# EAGLE board CamelDox Sch (EAGLE 8.5.0)
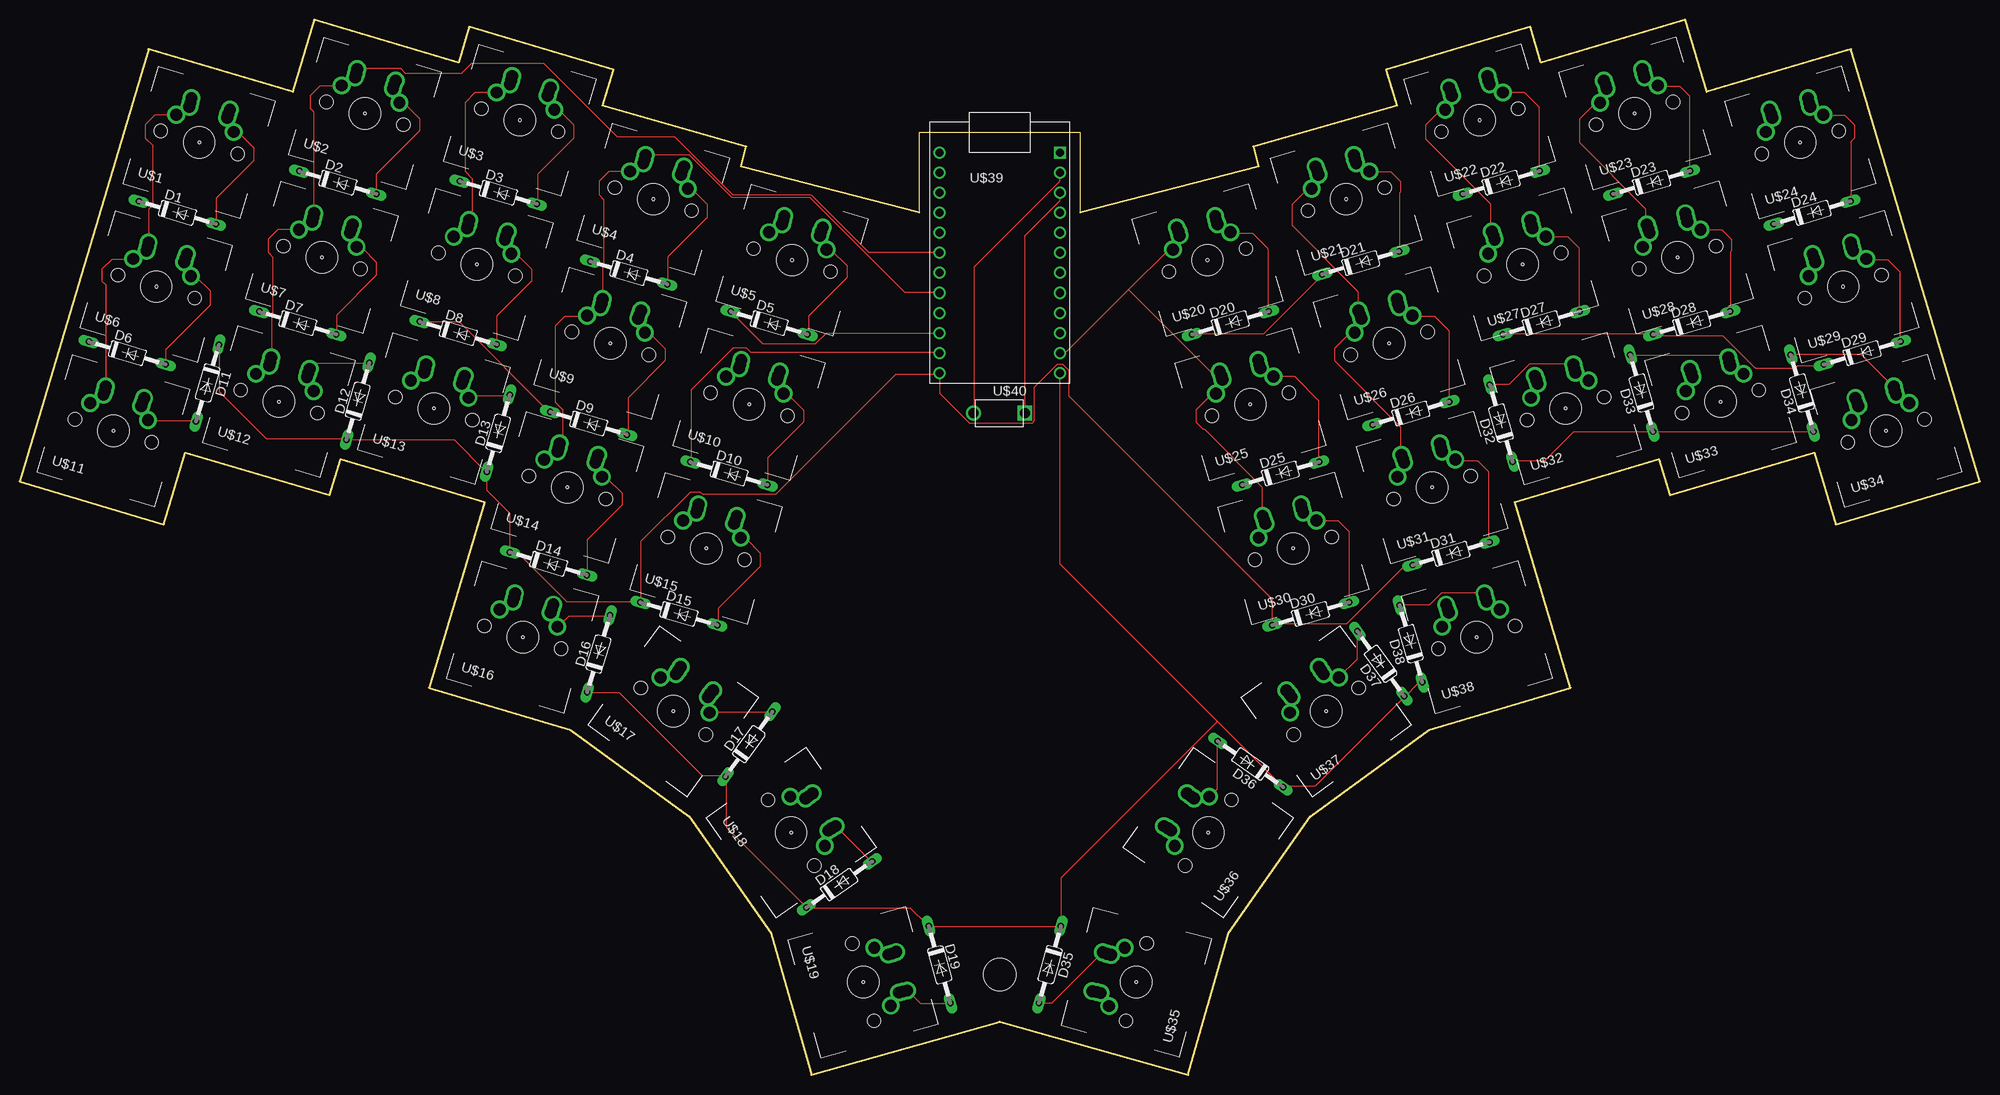
[diagram p0: board, top side]
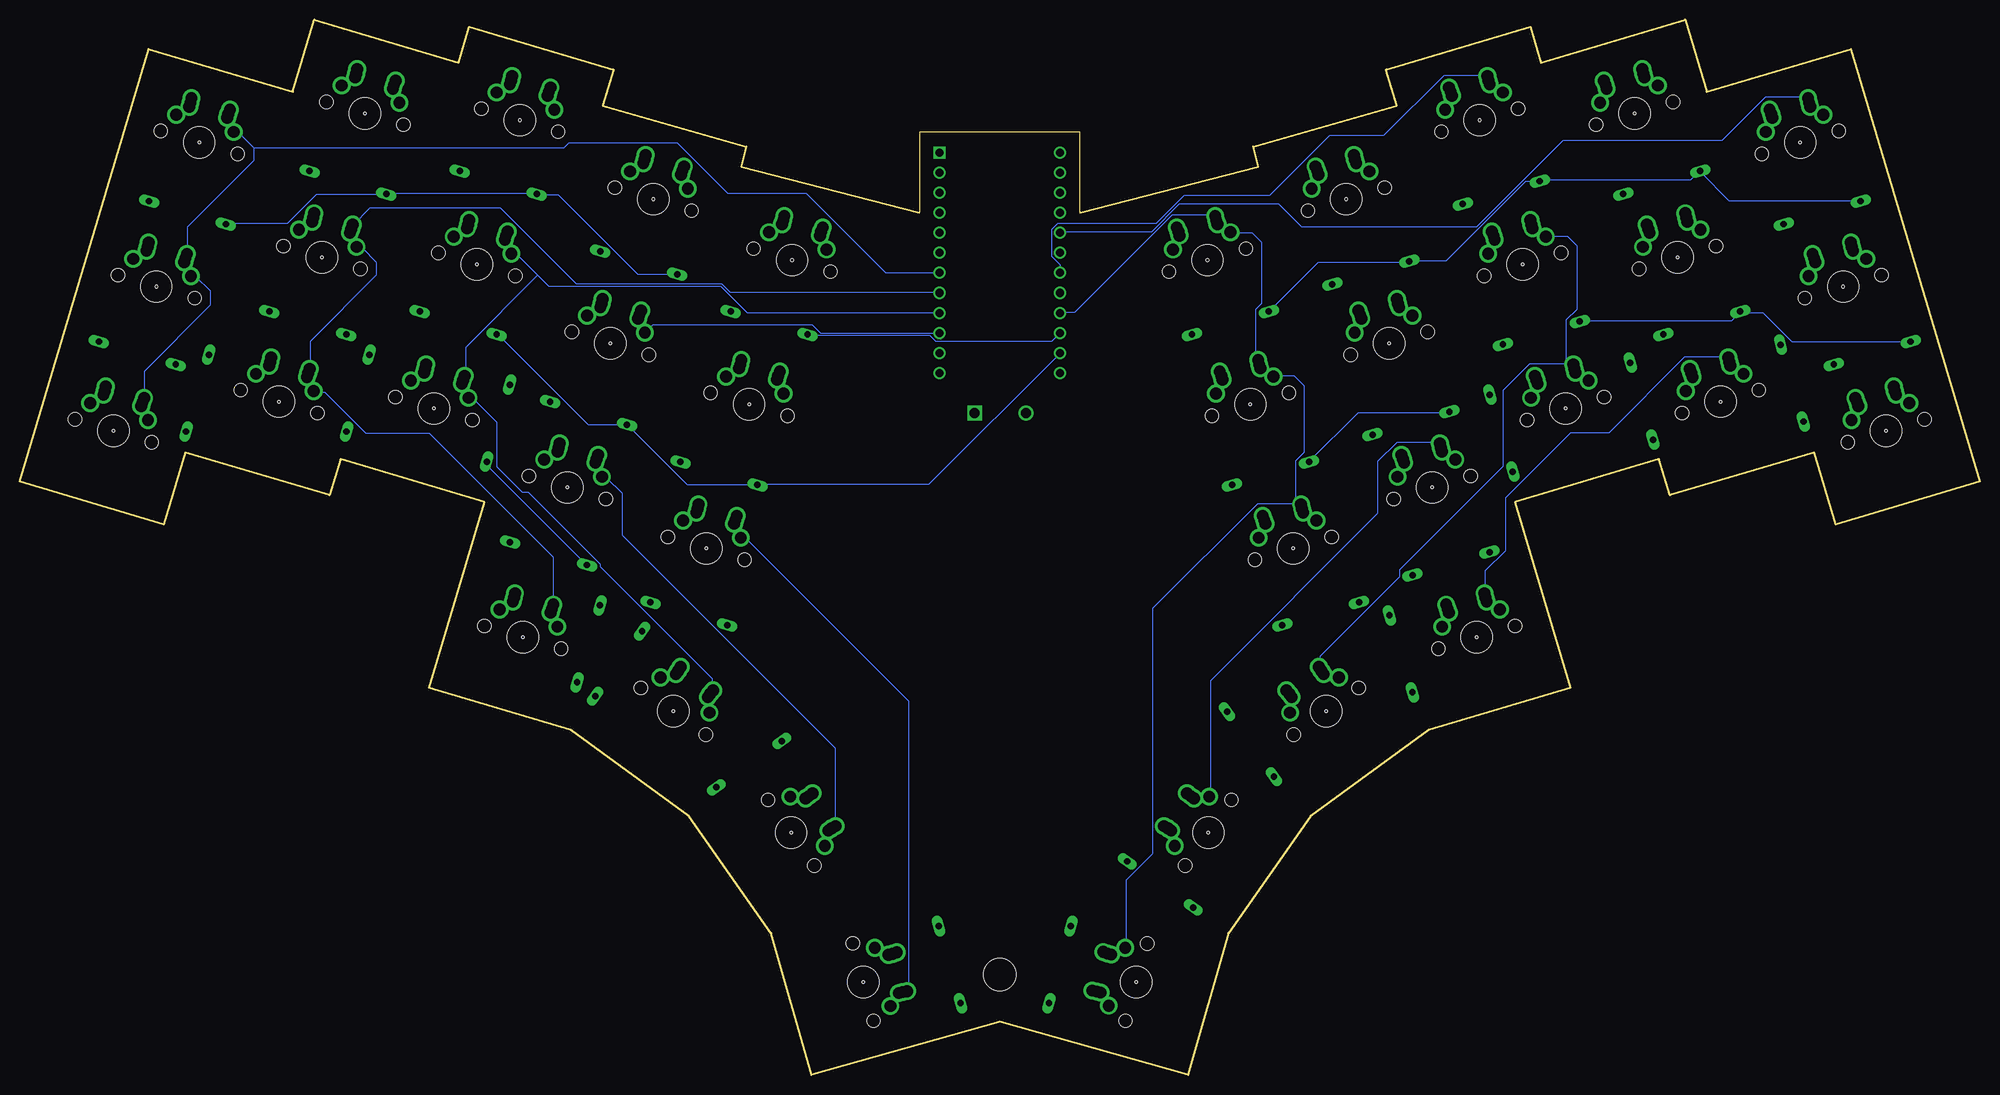
[diagram p1: board, bottom side, seen from below]

Size 248.21 x 133.66 mm. Coordinates in mm from the lower left corner, seen from the top.
Outline: 113.94,109.22 91.36,115.06 92,117.58 73.81,122.78 75.18,127.33 56.92,132.77 55.55,128.22 37.29,133.66 34.57,124.51 16.33,129.95 0,75.18 18.26,69.75 20.98,78.82 39.24,73.43 40.61,78 58.85,72.57 51.84,49.02 69.77,43.69 84.79,32.74 95.15,17.96 100.25,0 124.1,6.76 147.95,0 153.06,17.96 163.42,32.74 178.44,43.69 196.37,49.02 189.36,72.57 207.59,78 208.97,73.43 227.23,78.82 229.95,69.75 248.21,75.18 231.88,129.95 213.64,124.51 210.92,133.66 192.66,128.22 191.29,132.77 173.02,127.33 174.4,122.78 156.21,117.58 156.84,115.06 134.26,109.22 134.26,119.38 113.94,119.38 113.94,109.22
Copper layers (1*16): Top 0.035mm / dielectric 1.5mm / Bottom 0.035mm
Design rules "default": minimum track width 6mil, minimum drill 0.35mm, track to track 6mil, track to pad 6mil, pad to pad 6mil, via to via 6mil, smd to smd 6mil, copper to edge 40mil, drill to drill 6mil, minimum pad ring 10mil, minimum via ring 8mil, stop-mask expansion 4mil, vias tented up to drill 0mil, thermal gap 10mil
Holes 4.17 mm at 124.1,12.7

## Footprints (pad centres in the part's own frame; a part is rotated, then mirrored left to right if it is on the bottom)
DO35-10 = drill 0.813 long: A 5.08,0; C -5.08,0
MX/ALPS = drill 1.5: LAL -2.5,4; LAR -2.5,4.5; RAL 2.5,4; RAR 2.5,4.5 | drill 1.499: LCL -3.81,2.54; LCR -2.54,5.08; RCL 3.81,2.54; RCR 2.54,5.08 | hole 0.35: 0,0 | hole 3.988: 0,0 | hole 1.702: -5.08,0; 5.08,0
PROMICRO = drill 1.016: P$1 -7.62,0; P$2 -7.62,-2.54; P$3 -7.62,-5.08; P$4 -7.62,-7.62; P$5 -7.62,-10.16; P$6 -7.62,-12.7; P$7 -7.62,-15.24; P$8 -7.62,-17.78; P$9 -7.62,-20.32; P$10 -7.62,-22.86; P$11 -7.62,-25.4; P$12 -7.62,-27.94; P$13 7.62,-27.94; P$14 7.62,-25.4; P$15 7.62,-22.86; P$16 7.62,-20.32; P$17 7.62,-17.78; P$18 7.62,-15.24; P$19 7.62,-12.7; P$20 7.62,-10.16; P$21 7.62,-7.62; P$22 7.62,-5.08; P$23 7.62,-2.54 | drill 1.016 square: P$24 7.62,0
SKHL = drill 1.25 square: P$1 0,0 | drill 1.25: P$2 6.5,0

## Placement (x,y rotation side)
D1  1N4148DO35-10  [DO35-10]  19.96,109.22 343.4 top
D2  1N4148DO35-10  [DO35-10]  40.28,113.03 343.4 top
D3  1N4148DO35-10  [DO35-10]  60.6,111.76 343.4 top
D4  1N4148DO35-10  [DO35-10]  77.11,101.6 343.4 top
D5  1N4148DO35-10  [DO35-10]  94.89,95.25 343.4 top
D6  1N4148DO35-10  [DO35-10]  13.61,91.44 343.4 top
D7  1N4148DO35-10  [DO35-10]  35.2,95.25 343.4 top
D8  1N4148DO35-10  [DO35-10]  55.52,93.98 343.4 top
D9  1N4148DO35-10  [DO35-10]  72.03,82.55 343.4 top
D10  1N4148DO35-10  [DO35-10]  89.81,76.2 343.4 top
D11  1N4148DO35-10  [DO35-10]  23.77,87.63 253.4 top
D12  1N4148DO35-10  [DO35-10]  42.82,85.34 73.4 top
D13  1N4148DO35-10  [DO35-10]  60.6,81.28 73.4 top
D14  1N4148DO35-10  [DO35-10]  66.95,64.77 343.4 top
D15  1N4148DO35-10  [DO35-10]  83.46,58.42 343.4 top
D16  1N4148DO35-10  [DO35-10]  73.3,53.34 73.4 top
D17  1N4148DO35-10  [DO35-10]  92.35,41.91 54.2 top
D18  1N4148DO35-10  [DO35-10]  103.78,24.13 35.1 top
D19  1N4148DO35-10  [DO35-10]  116.48,13.97 285.8 top
D20  1N4148DO35-10  [DO35-10]  153.31,95.25 16.6 top
D21  1N4148DO35-10  [DO35-10]  169.82,102.87 16.6 top
D22  1N4148DO35-10  [DO35-10]  187.6,113.03 16.6 top
D23  1N4148DO35-10  [DO35-10]  206.65,113.03 16.6 top
D24  1N4148DO35-10  [DO35-10]  226.97,109.22 16.6 top
D25  1N4148DO35-10  [DO35-10]  159.66,76.2 16.6 top
D26  1N4148DO35-10  [DO35-10]  176.17,83.82 16.6 top
D27  1N4148DO35-10  [DO35-10]  192.68,95.25 16.6 top
D28  1N4148DO35-10  [DO35-10]  211.73,95.25 16.6 top
D29  1N4148DO35-10  [DO35-10]  233.32,91.44 16.6 top
D30  1N4148DO35-10  [DO35-10]  163.47,58.42 16.6 top
D31  1N4148DO35-10  [DO35-10]  181.25,66.04 16.6 top
D32  1N4148DO35-10  [DO35-10]  187.6,82.55 106.6 top
D33  1N4148DO35-10  [DO35-10]  205.38,86.36 106.6 top
D34  1N4148DO35-10  [DO35-10]  225.7,86.36 106.6 top
D35  1N4148DO35-10  [DO35-10]  130.45,13.97 254.2 top
D36  1N4148DO35-10  [DO35-10]  155.85,39.37 144.9 top
D37  1N4148DO35-10  [DO35-10]  172.36,52.07 125.8 top
D38  1N4148DO35-10  [DO35-10]  176.17,54.61 106.6 top
U$1  MANDOUBLEONESIDED  [MX/ALPS]  22.73,118.11 343.4 top
U$2  MANDOUBLEONESIDED  [MX/ALPS]  43.71,121.8 343.4 top
U$3  MANDOUBLEONESIDED  [MX/ALPS]  63.32,120.93 343.4 top
U$4  MANDOUBLEONESIDED  [MX/ALPS]  80.22,110.93 343.4 top
U$5  MANDOUBLEONESIDED  [MX/ALPS]  97.8,103.21 343.4 top
U$6  MANDOUBLEONESIDED  [MX/ALPS]  17.29,99.85 343.4 top
U$7  MANDOUBLEONESIDED  [MX/ALPS]  38.27,103.54 343.4 top
U$8  MANDOUBLEONESIDED  [MX/ALPS]  57.89,102.67 343.4 top
U$9  MANDOUBLEONESIDED  [MX/ALPS]  74.79,92.67 343.4 top
U$10  MANDOUBLEONESIDED  [MX/ALPS]  92.36,84.95 343.4 top
U$11  MANDOUBLEONESIDED  [MX/ALPS]  11.86,81.59 343.4 top
U$12  MANDOUBLEONESIDED  [MX/ALPS]  32.83,85.29 343.4 top
U$13  MANDOUBLEONESIDED  [MX/ALPS]  52.45,84.41 343.4 top
U$14  MANDOUBLEONESIDED  [MX/ALPS]  69.35,74.41 343.4 top
U$15  MANDOUBLEONESIDED  [MX/ALPS]  86.93,66.69 343.4 top
U$16  MANDOUBLEONESIDED  [MX/ALPS]  63.7,55.43 343.4 top
U$17  MANDOUBLEONESIDED  [MX/ALPS]  82.76,46.06 324.2 top
U$18  MANDOUBLEONESIDED  [MX/ALPS]  97.69,30.68 305.1 top
U$19  MANDOUBLEONESIDED  [MX/ALPS]  106.81,11.75 285.8 top
U$20  MANDOUBLEONESIDED  [MX/ALPS]  150.41,103.21 16.6 top
U$21  MANDOUBLEONESIDED  [MX/ALPS]  167.99,110.93 16.6 top
U$22  MANDOUBLEONESIDED  [MX/ALPS]  184.88,120.93 16.6 top
U$23  MANDOUBLEONESIDED  [MX/ALPS]  204.5,121.8 16.6 top
U$24  MANDOUBLEONESIDED  [MX/ALPS]  225.48,118.11 16.6 top
U$25  MANDOUBLEONESIDED  [MX/ALPS]  155.84,84.95 16.6 top
U$26  MANDOUBLEONESIDED  [MX/ALPS]  173.42,92.67 16.6 top
U$27  MANDOUBLEONESIDED  [MX/ALPS]  190.32,102.67 16.6 top
U$28  MANDOUBLEONESIDED  [MX/ALPS]  209.94,103.54 16.6 top
U$29  MANDOUBLEONESIDED  [MX/ALPS]  230.91,99.85 16.6 top
U$30  MANDOUBLEONESIDED  [MX/ALPS]  161.28,66.69 16.6 top
U$31  MANDOUBLEONESIDED  [MX/ALPS]  178.86,74.41 16.6 top
U$32  MANDOUBLEONESIDED  [MX/ALPS]  195.76,84.41 16.6 top
U$33  MANDOUBLEONESIDED  [MX/ALPS]  215.37,85.29 16.6 top
U$34  MANDOUBLEONESIDED  [MX/ALPS]  236.35,81.59 16.6 top
U$35  MANDOUBLEONESIDED  [MX/ALPS]  141.39,11.75 75 top
U$36  MANDOUBLEONESIDED  [MX/ALPS]  150.52,30.68 54.9 top
U$37  MANDOUBLEONESIDED  [MX/ALPS]  165.45,46.06 35.8 top
U$38  MANDOUBLEONESIDED  [MX/ALPS]  184.51,55.43 16.6 top
U$39  PROMICRO  [PROMICRO]  124.1,116.84 0 top
U$40  RSTSW  [SKHL]  127.28,83.82 180 top

## Library data of the parts
D1-D38 = diode
U$1-U$40 = Keys

## Nets
N$1: U$1.LAL U$1.LAR U$1.LCL U$1.LCR U$6.LAL U$6.LAR U$6.LCL U$6.LCR U$11.LAL U$11.LAR U$11.LCL U$11.LCR U$39.P$5
N$2: D1.A U$1.RAL U$1.RAR U$1.RCL U$1.RCR
N$3: D2.A U$2.RAL U$2.RAR U$2.RCL U$2.RCR
N$4: D3.A U$3.RAL U$3.RAR U$3.RCL U$3.RCR
N$5: D4.A U$4.RAL U$4.RAR U$4.RCL U$4.RCR
N$6: D5.A U$5.RAL U$5.RAR U$5.RCL U$5.RCR
N$7: D6.A U$6.RAL U$6.RAR U$6.RCL U$6.RCR
N$8: D7.A U$7.RAL U$7.RAR U$7.RCL U$7.RCR
N$9: D8.A U$8.RAL U$8.RAR U$8.RCL U$8.RCR
N$10: D9.A U$9.RAL U$9.RAR U$9.RCL U$9.RCR
N$11: D10.A U$10.RAL U$10.RAR U$10.RCL U$10.RCR
N$12: D11.A U$11.RAL U$11.RAR U$11.RCL U$11.RCR
N$13: D12.A U$12.RAL U$12.RAR U$12.RCL U$12.RCR
N$14: D13.A U$13.RAL U$13.RAR U$13.RCL U$13.RCR
N$15: D14.A U$14.RAL U$14.RAR U$14.RCL U$14.RCR
N$16: D15.A U$15.RAL U$15.RAR U$15.RCL U$15.RCR
N$17: D16.A U$16.RAL U$16.RAR U$16.RCL U$16.RCR
N$18: D17.A U$17.RAL U$17.RAR U$17.RCL U$17.RCR
N$19: D18.A U$18.RAL U$18.RAR U$18.RCL U$18.RCR
N$20: D19.A U$19.RAL U$19.RAR U$19.RCL U$19.RCR
N$21: U$2.LAL U$2.LAR U$2.LCL U$2.LCR U$7.LAL U$7.LAR U$7.LCL U$7.LCR U$12.LAL U$12.LAR U$12.LCL U$12.LCR U$16.LAL U$16.LAR U$16.LCL U$16.LCR U$39.P$6
N$22: U$3.LAL U$3.LAR U$3.LCL U$3.LCR U$8.LAL U$8.LAR U$8.LCL U$8.LCR U$13.LAL U$13.LAR U$13.LCL U$13.LCR U$17.LAL U$17.LAR U$17.LCL U$17.LCR U$39.P$7
N$23: U$4.LAL U$4.LAR U$4.LCL U$4.LCR U$9.LAL U$9.LAR U$9.LCL U$9.LCR U$14.LAL U$14.LAR U$14.LCL U$14.LCR U$18.LAL U$18.LAR U$18.LCL U$18.LCR U$39.P$8
N$24: U$5.LAL U$5.LAR U$5.LCL U$5.LCR U$10.LAL U$10.LAR U$10.LCL U$10.LCR U$15.LAL U$15.LAR U$15.LCL U$15.LCR U$19.LAL U$19.LAR U$19.LCL U$19.LCR U$39.P$9
N$25: D1.C D2.C D3.C D4.C D5.C D20.C D21.C D22.C D23.C D24.C U$39.P$10
N$26: D6.C D7.C D8.C D9.C D10.C D25.C D26.C D27.C D28.C D29.C U$39.P$11
N$27: D11.C D12.C D13.C D14.C D15.C D30.C D31.C D32.C D33.C D34.C U$39.P$12
N$28: D16.C D17.C D18.C D19.C D35.C D36.C D37.C D38.C U$39.P$13
N$29: U$20.LAL U$20.LAR U$20.LCL U$20.LCR U$25.LAL U$25.LAR U$25.LCL U$25.LCR U$30.LAL U$30.LAR U$30.LCL U$30.LCR U$35.LAL U$35.LAR U$35.LCL U$35.LCR U$39.P$14
N$30: D20.A U$20.RAL U$20.RAR U$20.RCL U$20.RCR
N$31: D21.A U$21.RAL U$21.RAR U$21.RCL U$21.RCR
N$32: D22.A U$22.RAL U$22.RAR U$22.RCL U$22.RCR
N$33: D23.A U$23.RAL U$23.RAR U$23.RCL U$23.RCR
N$34: D24.A U$24.RAL U$24.RAR U$24.RCL U$24.RCR
N$35: D25.A U$25.RAL U$25.RAR U$25.RCL U$25.RCR
N$36: D26.A U$26.RAL U$26.RAR U$26.RCL U$26.RCR
N$37: D27.A U$27.RAL U$27.RAR U$27.RCL U$27.RCR
N$38: D28.A U$28.RAL U$28.RAR U$28.RCL U$28.RCR
N$39: D29.A U$29.RAL U$29.RAR U$29.RCL U$29.RCR
N$40: D30.A U$30.RAL U$30.RAR U$30.RCL U$30.RCR
N$41: D31.A U$31.RAL U$31.RAR U$31.RCL U$31.RCR
N$42: D32.A U$32.RAL U$32.RAR U$32.RCL U$32.RCR
N$43: D33.A U$33.RAL U$33.RAR U$33.RCL U$33.RCR
N$44: D34.A U$34.RAL U$34.RAR U$34.RCL U$34.RCR
N$45: D35.A U$35.RAL U$35.RAR U$35.RCL U$35.RCR
N$46: D36.A U$36.RAL U$36.RAR U$36.RCL U$36.RCR
N$47: D37.A U$37.RAL U$37.RAR U$37.RCL U$37.RCR
N$48: D38.A U$38.RAL U$38.RAR U$38.RCL U$38.RCR
N$49: U$21.LAL U$21.LAR U$21.LCL U$21.LCR U$26.LAL U$26.LAR U$26.LCL U$26.LCR U$31.LAL U$31.LAR U$31.LCL U$31.LCR U$36.LAL U$36.LAR U$36.LCL U$36.LCR U$39.P$15
N$50: U$22.LAL U$22.LAR U$22.LCL U$22.LCR U$27.LAL U$27.LAR U$27.LCL U$27.LCR U$32.LAL U$32.LAR U$32.LCL U$32.LCR U$37.LAL U$37.LAR U$37.LCL U$37.LCR U$39.P$16
N$51: U$23.LAL U$23.LAR U$23.LCL U$23.LCR U$28.LAL U$28.LAR U$28.LCL U$28.LCR U$33.LAL U$33.LAR U$33.LCL U$33.LCR U$38.LAL U$38.LAR U$38.LCL U$38.LCR U$39.P$17
N$52: U$24.LAL U$24.LAR U$24.LCL U$24.LCR U$29.LAL U$29.LAR U$29.LCL U$29.LCR U$34.LAL U$34.LAR U$34.LCL U$34.LCR U$39.P$18
N$53: U$39.P$22 U$40.P$1
N$54: U$39.P$23 U$40.P$2

## Tracks (layer width: path | path; a pad name or v marks a point on that pad's centre or on a via)
N$1
  Top 0.152: U$11.LCL 9.04,85.14 9.65,85.14 10.57,86.05 U$11.LAL 10.87,86.66 | 10.87,86.66 10.87,87.12 U$11.LCR 10.87,86.66 | 10.87,86.66 U$11.LAR 10.87,87.27 10.87,100.08 10.41,100.53 10.41,102.06 11.63,103.28 14.22,103.28 U$6.LCL 14.38,103.43 14.99,103.43 15.9,104.34 U$6.LAL 16.2,104.95 | 16.2,104.95 16.2,105.41 U$6.LCR 16.2,104.95 | 16.2,104.95 U$6.LAR 16.36,105.56 16.36,109.68 16.81,110.13 16.81,117.75 15.9,118.67 15.9,120.34 17.12,121.56 19.71,121.56 U$1.LCL 19.86,121.72 20.47,121.72 21.39,122.63 U$1.LAR
  Bottom 0.152: 21.84,123.7 U$1.LAL | U$39.P$5 116.48,106.78 104.9,106.78 101.4,110.29 88.75,110.29 85.85,107.39 63.75,107.39 52.78,118.36 32.66,118.36 27.18,123.85 21.84,123.85 U$1.LAR 21.84,123.7 | 21.84,123.7 U$1.LCR
N$2
  Top 0.152: D1.A 24.89,107.85 24.89,111.05 29.62,115.77 29.62,117.45 27.63,119.43 27.18,119.43 U$1.RCL
N$3
  Top 0.152: D2.A 45.16,111.66 45.16,114.1 50.65,119.58 50.65,121.11 48.67,123.09 48.21,123.09 U$2.RCL
N$4
  Top 0.152: D3.A 65.58,110.44 65.58,114.1 70.15,118.67 70.15,120.34 68.33,122.17 67.72,122.17 U$3.RCL
N$5
  Top 0.152: D4.A 82.04,100.23 82.04,103.58 87.07,108.61 87.07,110.29 85.09,112.27 84.63,112.27 U$4.RCL
N$6
  Top 0.152: D5.A 99.87,93.83 99.87,96.11 104.75,100.99 104.75,102.51 102.77,104.5 102.31,104.5 U$5.RCL
N$7
  Top 0.152: D6.A 18.49,90.02 18.49,91.85 24.13,97.48 24.13,99.31 22.3,101.14 21.69,101.14 U$6.RCL
N$8
  Top 0.152: D7.A 40.13,93.83 40.13,96.27 45.16,101.3 45.16,102.97 43.33,104.8 42.72,104.8 U$7.RCL
N$9
  Top 0.152: D8.A 60.4,92.61 60.4,96.11 64.82,100.53 64.82,102.06 62.99,103.89 62.38,103.89 U$8.RCL
N$10
  Top 0.152: D9.A 77.01,81.18 77.01,85.75 81.74,90.47 81.74,92 79.76,93.98 79.3,93.98 U$9.RCL
N$11
  Top 0.152: D10.A 94.69,74.78 94.69,78.13 99.26,82.7 99.26,84.23 97.28,86.21 96.82,86.21 U$10.RCL
N$12
  Top 0.152: D11.A 22.3,82.86 16.36,82.86 U$11.RCL
N$13
  Top 0.152: D12.A 44.25,90.17 37.39,90.17 36.78,89.56 U$12.RAR
N$14
  Top 0.152: D13.A 61.93,86.05 57.05,86.05 56.9,85.9 U$13.RCL
N$15
  Top 0.152: D14.A 71.83,63.35 71.83,67.77 76.25,72.19 76.25,73.71 74.27,75.69 73.81,75.69 U$14.RCL
N$16
  Top 0.152: D15.A 88.44,57.1 88.44,59.08 93.78,64.41 93.78,66.09 91.95,67.92 91.34,67.92 U$15.RCL
N$17
  Top 0.152: D16.A 74.73,58.17 69.55,58.17 68.17,56.79 U$16.RCL
N$18
  Top 0.152: D17.A 95.3,45.97 87.38,45.97 U$17.RCL
N$19
  Top 0.152: D18.A 107.8,27.08 103.38,31.5 U$18.RAL
N$20
  Top 0.152: D19.A 117.86,9.09 114.05,9.09 112.52,10.62 U$19.RAR
N$21
  Top 0.152: U$16.LCL 60.86,59.08 61.62,59.08 62.38,59.84 U$16.LAR 62.69,60.6 62.69,60.91 U$16.LCR 62.38,59.99 U$16.LAL | U$12.LCL 29.92,88.95 30.68,88.95 31.45,89.71 U$12.LAR 31.75,90.32 31.75,90.78 U$12.LCR | U$12.LAL 31.6,89.86 U$12.LCR | U$7.LCR 37.24,109.07 37.24,108.61 U$7.LAR 36.93,108 36.02,107.09 35.41,107.09 U$7.LCL 35.25,107.09 32.66,107.09 31.45,105.87 31.45,104.19 32.05,103.58 32.05,96.57 31.9,96.42 31.9,90.93 U$12.LCR | U$7.LAL 36.93,108.15 U$7.LCR | U$39.P$6 116.48,104.19 107.49,104.19 100.18,111.51 90.27,111.51 82.96,118.82 75.64,118.82 66.34,128.12 57.2,128.12 55.98,126.9 48.82,126.9 48.21,127.51 42.88,127.51 U$2.LCR 42.57,126.44 | 42.57,126.44 42.57,126.75 U$2.LAR 42.57,126.44 | 42.57,126.44 U$2.LAL 42.42,126.29 41.5,125.37 40.89,125.37 U$2.LCL 40.74,125.22 38,125.22 36.78,124 36.78,122.48 37.24,122.02 37.24,109.22 U$7.LCR
  Bottom 0.152: U$16.LAL 62.69,61.06 62.69,63.8 60.1,66.4 60.1,73.1 51.87,81.33 46.99,81.33 37.39,90.93 31.9,90.93 U$12.LCR
N$22
  Top 0.152: U$3.LCR 62.08,125.53 U$3.LAL 62.23,125.98 U$3.LAR 61.93,125.37 61.01,124.46 U$3.LCL 60.25,124.46 57.66,124.46 56.44,123.24 56.44,114.4 57.35,113.49 57.35,108.61 57.05,108.31 U$8.LCR | U$8.LCL 55.07,106.32 55.83,106.32 56.59,107.09 U$8.LAR 56.9,107.85 56.9,108.15 U$8.LCR | U$8.LAL 56.59,107.24 U$8.LCR | U$17.LCL 81.28,50.39 82.65,50.39 82.96,50.7 U$17.LAL 83.26,51.31 83.57,51.61 U$17.LCR 83.26,51.16 U$17.LAR | U$13.LCL 49.58,88.04 50.19,88.04 51.1,88.95 U$13.LAL 51.41,89.56 51.41,89.86 U$13.LCR 51.41,89.41 U$13.LAR
  Bottom 0.152: U$39.P$7 116.48,102.67 117.55,103.73 117.55,107.09 116.79,107.85 104.29,107.85 100.79,111.35 89.97,111.35 82.35,118.97 75.49,118.97 67.87,126.59 62.38,126.59 U$3.LCR | 52.32,90.02 51.56,90.02 U$13.LAR | 52.32,90.02 57.05,90.02 60.4,86.66 60.4,77.06 73.51,63.96 73.51,63.04 83.57,52.98 83.57,51.77 U$17.LAR | 52.32,90.02 52.32,95.66 50.95,97.03 50.95,104.95 52.17,106.17 54.91,106.17 U$8.LCL | 52.32,90.02 U$13.LCR
N$23
  Top 0.152: 73.51,97.18 72.59,96.27 71.98,96.27 U$9.LCL 71.83,96.11 69.09,96.11 67.87,94.89 67.87,85.14 68.78,84.23 68.78,80.42 68.48,80.11 U$14.LAR 68.33,79.5 | 73.51,97.18 U$9.LAL 73.66,97.79 U$9.LAR 73.81,98.4 73.81,102.82 73.96,102.97 73.96,110.9 73.36,111.51 73.36,113.18 74.57,114.4 77.17,114.4 U$4.LCL 77.32,114.55 77.93,114.55 78.84,115.47 | 73.51,97.18 U$9.LCR | U$39.P$8 116.48,99.16 112.06,99.16 100.03,111.2 90.12,111.2 84.79,116.54 79.3,116.54 U$4.LCR 78.84,115.47 | 78.84,115.47 U$4.LAL 78.99,115.93 U$4.LAR | U$18.LCL 97.59,35.15 99.42,35.15 U$18.LAR 100.03,35.31 100.33,35.61 U$18.LCR 99.57,35.15 U$18.LAL | U$14.LCL 66.5,77.98 67.11,77.98 68.02,78.89 U$14.LAL 68.33,79.5 | 68.33,79.5 68.33,79.96 U$14.LCR 68.33,79.5
  Bottom 0.152: U$18.LCL 97.43,35.31 97.43,49.94 76.25,71.12 76.25,77.67 73.81,80.11 68.48,80.11 U$14.LAR
N$24
  Top 0.152: U$5.LCL 95,106.78 95.61,106.78 96.52,107.7 U$5.LAR 96.67,108.31 U$5.LAL 96.52,107.85 U$5.LCR | U$10.LCL 89.51,88.49 90.12,88.49 91.03,89.41 U$10.LAR 91.34,90.02 91.34,90.47 U$10.LCR 91.03,89.56 U$10.LAL | U$19.LCR 111,15.49 110.54,15.49 U$19.LAL | U$19.LCL 108.25,16.1 109.17,16.1 109.93,15.34 U$19.LCR | U$19.LAR 110.39,15.49 U$19.LCR | U$15.LCL 84.02,70.36 84.79,70.36 85.55,71.12 U$15.LAL 85.85,71.73 | 85.85,71.73 85.85,72.19 U$15.LCR 85.85,71.73 | 85.85,71.73 U$15.LAR
  Bottom 0.152: U$39.P$9 116.48,96.57 114.66,96.57 102.31,108.91 96.82,108.91 U$5.LCR | 86.61,72.34 86,72.34 U$15.LAR 86.61,72.34 | 86.61,72.34 91.49,72.34 104.75,59.08 104.75,27.99 108.1,24.64 108.1,16.26 U$19.LCL | 86.61,72.34 86.61,77.83 85.55,78.89 85.55,87.27 86.77,88.49 89.36,88.49 U$10.LCL | U$5.LCL 94.84,106.63 92.1,106.63 90.88,105.41 90.88,97.79 91.64,97.03 91.64,90.78 91.49,90.63 U$10.LCR
N$25
  Top 0.152: D20.C 148.49,93.83 157.48,93.83 164.95,101.3 D21.C | U$39.P$10 102.16,93.98 100.79,92.61 94.08,92.61 90.12,96.57 D5.C
  Bottom 0.152: D24.C 222.1,107.85 214.32,107.85 210.67,111.51 201.83,111.51 D23.C 201.68,111.66 182.78,111.66 D22.C 182.63,111.51 180.03,111.51 169.98,101.45 165.1,101.45 D21.C | D1.C 15.14,110.74 31.75,110.74 35.41,114.4 D2.C 35.56,114.4 36.63,113.33 55.68,113.33 D3.C 55.83,113.18 57.51,113.18 67.56,103.12 72.14,103.12 D4.C 72.29,102.97 83.72,102.97 89.97,96.72 D5.C | U$39.P$10 117.55,92.91 132.18,92.91 132.94,93.67 148.34,93.67 D20.C
N$26
  Top 0.152: D27.C 187.96,93.83 206.86,93.83 D28.C 207.01,93.67 215.7,93.67 219.81,89.56 224.84,89.56 225.14,89.86 228.35,89.86 D29.C | U$39.P$11 116.48,91.54 92.56,91.54 91.95,92.15 90.42,92.15 85.09,86.82 85.09,77.67 D10.C | D8.C 50.8,95.35 55.68,95.35 67.11,83.92 D9.C
  Bottom 0.152: D27.C 187.81,93.67 187.5,93.67 176.22,82.4 171.35,82.4 D26.C 171.2,82.24 163.73,74.78 154.89,74.78 D25.C 154.74,74.78 133.1,74.78 116.48,91.39 U$39.P$11 | D6.C 8.89,92.91 23.82,92.91 27.48,96.57 30.23,96.57 D7.C 30.38,96.57 31.45,95.5 50.65,95.5 D8.C | D9.C 67.26,83.92 78.69,83.92 84.94,77.67 D10.C
N$27
  Top 0.152: D31.C 176.38,64.57 175.46,64.57 168,57.1 158.7,57.1 D30.C 158.55,57.1 158.55,60.3 132.79,86.05 132.79,89.26 132.03,90.02 131.42,90.02 128.52,87.12 128.52,82.86 128.22,82.55 120.29,82.55 116.48,86.36 116.48,88.8 | D32.C 189.18,77.83 193.14,77.83 196.8,81.48 206.7,81.48 D33.C 206.86,81.48 227.13,81.48 D34.C | D11.C 25.35,92.46 25.35,86.51 31.29,80.57 41.35,80.57 D12.C 41.5,80.42 55.07,80.42 59.03,76.45 D13.C 59.18,76.3 59.18,74.02 62.08,71.12 62.08,66.24 D14.C 62.23,66.09 63.14,66.09 69.24,59.99 78.54,59.99 D15.C 78.69,59.99 78.69,67.61 84.94,73.86 86.16,73.86 86.46,73.56 95.76,73.56 111,88.8 116.48,88.8 | 116.48,88.8 U$39.P$12
  Bottom 0.152: D32.C 189.03,77.67 189.03,77.22 176.53,64.72 D31.C
N$28
  Top 0.152: D16.C 71.98,48.41 75.95,48.41 86.46,37.9 89.36,37.9 D17.C 89.51,37.74 89.51,31.34 99.57,21.29 D18.C 99.72,21.13 112.83,21.13 114.96,19 D19.C 115.11,18.85 131.72,18.85 D35.C 131.88,19 131.88,24.94 151.69,44.75 | D38.C 177.6,49.63 177.14,49.63 175.46,47.95 D37.C 175.31,47.8 164.03,36.53 160.07,36.53 D36.C 159.92,36.53 151.69,44.75 | U$39.P$13 131.72,64.72 151.69,44.75
N$29
  Top 0.152: U$35.LAR 136.3,10.62 U$35.LCR 136.91,10.31 | 136.91,10.31 137.82,9.4 137.82,8.79 U$35.LCL | 136.91,10.31 U$35.LAL | U$30.LCL 157.02,68.07 157.02,69.14 157.63,69.75 U$30.LCR 157.48,70.36 U$30.LAR | U$30.LAL 157.63,69.9 U$30.LAR | 152.3,88.04 151.54,87.27 151.54,86.36 U$25.LCL 151.38,86.21 150.93,86.21 148.94,84.23 148.94,82.7 149.86,81.79 150.01,81.79 157.33,74.47 157.33,70.97 U$30.LAR | 152.3,88.04 U$25.LAR 152.3,88.65 151.99,88.95 U$25.LCR 152.3,88.04 | 152.3,88.04 U$25.LAL 151.84,89.1 150.77,89.1 140.41,99.47 | U$20.LAL 146.66,106.93 146.66,107.24 U$20.LCR 146.66,106.78 U$20.LAR 146.81,106.32 146.81,105.41 146.05,104.65 U$20.LCL 145.9,104.5 145.44,104.5 140.41,99.47 | 140.41,99.47 132.49,91.54 131.72,91.54 U$39.P$14
  Bottom 0.152: U$35.LCR 135.69,10.62 135.69,47.35 156.26,67.92 156.87,67.92 U$30.LCL
N$30
  Top 0.152: D20.A 158.09,96.72 158.09,104.65 156.11,106.63 153.36,106.63 U$20.RCL
N$31
  Top 0.152: D21.A 174.7,104.34 174.7,111.66 174.85,111.81 174.85,113.18 173.63,114.4 171.04,114.4 U$21.RCL
N$32
  Top 0.152: D22.A 192.38,114.55 192.38,122.63 190.55,124.46 187.96,124.46 U$22.RCL
N$33
  Top 0.152: D23.A 211.43,114.55 211.43,124 210.21,125.22 207.47,125.22 U$23.RCL
N$34
  Top 0.152: D24.A 231.85,110.74 231.85,118.21 232.31,118.67 232.31,120.34 231.09,121.56 228.5,121.56 U$24.RCL
N$35
  Top 0.152: D25.A 164.49,77.67 164.49,85.45 161.44,88.49 158.85,88.49 U$25.RCL
N$36
  Top 0.152: D26.A 180.95,85.29 180.95,94.28 179.12,96.11 176.38,96.11 U$26.RCL
N$37
  Top 0.152: D27.A 197.41,96.72 197.41,104.8 196.04,106.17 193.29,106.17 U$27.RCL
N$38
  Top 0.152: D28.A 216.61,96.72 216.61,104.19 216.76,104.34 216.76,105.87 215.54,107.09 212.95,107.09 U$28.RCL
N$39
  Top 0.152: D29.A 238.1,92.91 238.1,101.75 236.57,103.28 233.98,103.28 U$29.RCL
N$40
  Top 0.152: D30.A 168.3,59.99 168.3,68.83 166.93,70.21 164.34,70.21 U$30.RCL
N$41
  Top 0.152: D31.A 185.98,67.61 185.98,76.45 184.61,77.83 181.86,77.83 U$31.RCL
N$42
  Top 0.152: D32.A 186.28,87.43 188.57,87.43 191.16,90.02 196.65,90.02 U$32.RAL
N$43
  Top 0.152: D33.A 203.96,91.08 216.15,91.08 216.31,90.93 U$33.RCR
N$44
  Top 0.152: D34.A 224.38,91.24 233.22,91.24 237.19,87.27 U$34.RAR
N$45
  Top 0.152: D35.A 129.13,9.09 130.66,9.09 137.06,15.49 U$35.RCR
N$46
  Top 0.152: D36.A 151.69,42.16 151.69,36.22 150.77,35.31 U$36.RCL
N$47
  Top 0.152: D37.A 169.37,56.19 169.37,52.68 167.08,50.39 U$37.RCL
N$48
  Top 0.152: D38.A 174.85,59.54 178.51,59.54 180.03,61.06 185.37,61.06 U$38.RAR
N$49
  Top 0.152: U$36.LCR 144.98,31.5 145.29,31.19 U$36.LAR 145.9,30.89 | 145.9,30.89 146.2,30.58 146.2,29.06 U$36.LCL | 145.9,30.89 U$36.LAL | 164.19,114.55 164.19,115.01 U$21.LCR 164.19,114.55 | 164.19,114.55 U$21.LAL 164.34,113.94 163.73,113.33 163.73,112.42 U$21.LCL 163.58,112.27 163.12,112.27 161.14,110.29 161.14,107.54 169.52,99.16 169.52,96.88 U$26.LCR | 164.19,114.55 U$21.LAR | 175.31,77.52 174.55,76.76 174.55,75.84 U$31.LCL | 175.31,77.52 U$31.LAL 175.16,77.98 U$31.LAR 174.85,78.59 174.85,82.09 166.47,90.47 166.47,92 168.45,93.98 168.91,93.98 U$26.LCL | 175.31,77.52 U$31.LCR | U$26.LCR 169.67,96.72 169.67,96.42 U$26.LAR | U$26.LAL 169.82,95.81 169.82,96.27 U$26.LCR
  Bottom 0.152: U$39.P$15 146.81,93.98 147.88,95.05 168,95.05 168.6,94.44 | 168.6,94.44 168.91,94.13 U$26.LCL 168.6,94.44 | 168.6,94.44 169.82,95.66 U$26.LAL | U$36.LAL 144.98,31.65 144.98,41.4 171.96,68.38 171.96,73.71 173.94,75.69 174.4,75.69 U$31.LCL
N$50
  Top 0.152: 160.98,47.8 160.98,45.97 U$37.LCL | 160.98,47.8 U$37.LAR 160.83,48.26 160.53,48.56 U$37.LCR 160.98,47.8 | 160.98,47.8 U$37.LAL | U$32.LCL 191.47,85.9 191.47,86.82 192.07,87.43 U$32.LAR 192.07,88.04 191.92,88.19 191.92,88.49 U$32.LCR 192.07,87.58 U$32.LAL | 181.25,124 180.64,123.39 180.64,122.33 U$22.LCL 180.49,122.17 179.88,122.17 178.05,120.34 178.05,118.52 186.28,110.29 186.28,106.93 U$27.LCR | 181.25,124 U$22.LCR 181.1,124.61 U$22.LAR 181.25,124 | 181.25,124 U$22.LAL | U$27.LCR 186.44,106.78 186.44,106.48 186.59,106.32 U$27.LAR | U$27.LCR 186.74,106.17 186.74,105.87 U$27.LAL 186.74,105.72 186.74,104.8 185.98,104.04 U$27.LCL
  Bottom 0.152: U$37.LAL 160.53,48.72 160.53,50.24 174.7,64.41 174.7,64.72 183.84,73.86 184.61,73.86 187.81,77.06 187.81,82.7 190.85,85.75 191.31,85.75 U$32.LCL | 182.63,101.3 185.22,103.89 185.83,103.89 U$27.LCL | 182.63,101.3 181.25,99.92 159.46,99.92 156.11,96.57 131.72,96.57 U$39.P$16 | 182.63,101.3 191.77,92.15 191.77,88.65 U$32.LCR
N$51
  Top 0.152: U$38.LCL 180.19,56.79 180.19,57.71 180.95,58.47 U$38.LAR 180.8,59.08 180.64,59.23 180.64,59.54 U$38.LCR 180.95,58.62 U$38.LAL | U$33.LCL 211.12,86.66 211.12,87.73 211.73,88.34 U$33.LAR 211.58,88.95 211.58,89.41 U$33.LCR 211.73,88.49 U$33.LAL | 200.91,124.92 200.15,124.15 200.15,123.24 U$23.LCL 200,123.09 199.54,123.09 197.56,121.11 197.56,118.06 205.94,109.68 205.94,107.7 U$28.LAR 206.25,107.24 206.09,107.24 U$28.LAL 206.25,106.63 | 200.91,124.92 U$23.LCR 200.76,125.37 U$23.LAR 200.91,124.92 | 200.91,124.92 U$23.LAL | 206.25,106.63 205.64,106.02 205.64,104.95 U$28.LCL | 206.25,106.63 U$28.LCR
  Bottom 0.152: U$38.LCR 180.64,59.69 180.64,65.63 196.34,81.33 204.42,81.33 209.6,86.51 210.97,86.51 U$33.LCL | U$39.P$17 131.72,99.16 158.24,99.16 159.31,100.23 177.75,100.23 187.35,109.83 203.81,109.83 205.94,107.7 U$28.LCR | U$33.LCR 211.43,89.56 211.43,92.91 203.05,101.3 203.05,102.97 204.88,104.8 205.49,104.8 U$28.LCL
N$52
  Top 0.152: 232.76,84.68 232,83.92 232,83.01 U$34.LCL | 232.76,84.68 U$34.LCR 232.61,85.29 U$34.LAR 232.76,84.68 | 232.76,84.68 U$34.LAL | U$29.LCL 226.67,101.3 226.67,102.21 227.28,102.82 U$29.LAR 227.13,103.58 227.13,103.89 U$29.LCR 227.28,102.97 U$29.LAL | U$24.LAR 221.64,121.87 221.64,122.17 U$24.LCR 221.94,121.56 221.94,121.26 U$24.LAL 221.79,121.11 221.79,120.19 221.18,119.58 U$24.LCL
  Bottom 0.152: U$39.P$18 138.58,101.6 148.64,111.66 158.55,111.66 164.95,118.06 178.66,118.06 179.27,117.45 218.59,117.45 | 218.59,117.45 220.57,119.43 221.03,119.43 U$24.LCL | 218.59,117.45 218.59,115.77 226.97,107.39 226.97,104.04 U$29.LCR | U$34.LAL U$34.LCR 232.46,89.1 224.08,97.48 224.08,99.31 225.91,101.14 226.52,101.14 U$29.LCL
N$53
  Top 0.152: U$39.P$22 131.72,110.74 127.3,106.32 127.3,83.92 U$40.P$1
N$54
  Top 0.152: U$39.P$23 131.72,113.18 120.9,102.36 120.9,83.92 U$40.P$2